# EAGLE board Helloworldbrd2 (EAGLE 7.5.0)
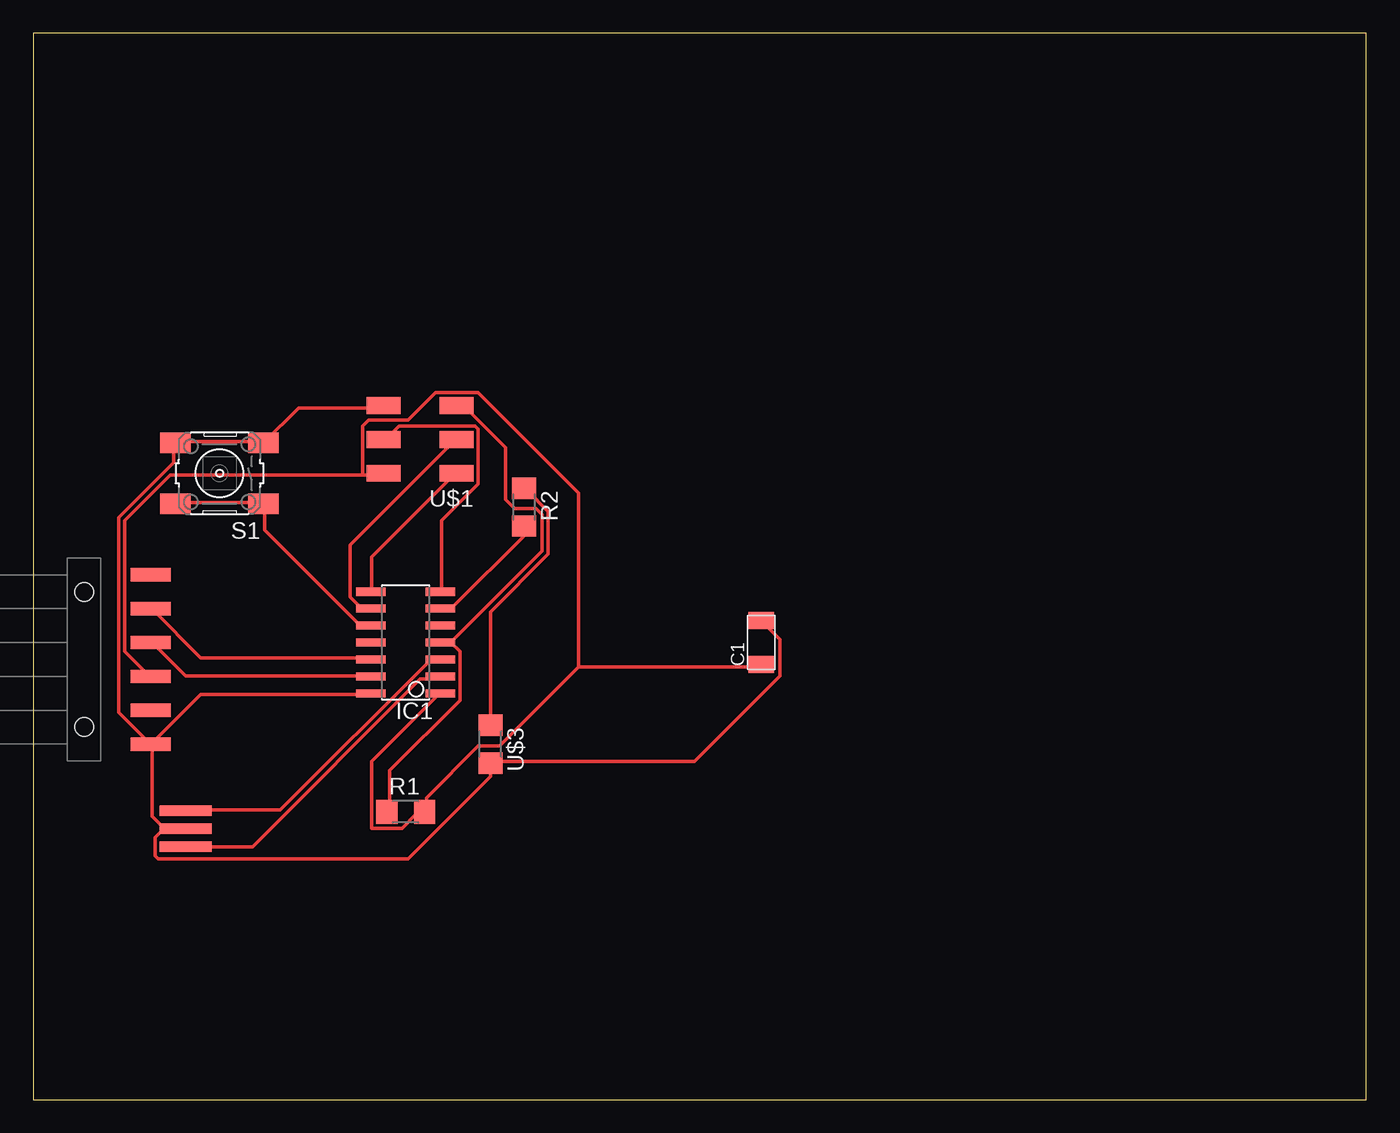
[diagram p0: board, top side]

Size 100 x 80 mm. Coordinates in mm from the lower left corner, seen from the top.
Outline: 0,0 100,0 100,80 0,80 0,0
Copper layers (1*16): Top 0.035mm / dielectric 1.5mm / Bottom 0.035mm
Design rules "default": minimum track width 10mil, minimum drill 24mil, track to track 8mil, track to pad 8mil, pad to pad 8mil, via to via 8mil, smd to smd 8mil, copper to edge 40mil, drill to drill 8mil, minimum pad ring 10mil, minimum via ring 8mil, stop-mask expansion 4mil, vias tented up to drill 0mil, thermal gap 10mil

## Footprints (pad centres in the part's own frame; a part is rotated, then mirrored left to right if it is on the bottom)
C1206FAB = smd 1.27 x 1.905: 1 -1.651,0; 2 1.651,0
SOIC14 = smd 0.61 x 2.21: 1 -3.81,-2.603; 2 -2.54,-2.603; 3 -1.27,-2.603; 4 0,-2.603; 5 1.27,-2.603; 6 2.54,-2.603; 7 3.81,-2.603; 8 3.81,2.603; 9 2.54,2.603; 10 1.27,2.603; 11 0,2.603; 12 -1.27,2.603; 13 -2.54,2.603; 14 -3.81,2.603
1X06-SMD = smd 1 x 3: 1 -6.35,5; 2 -3.81,5; 3 -1.27,5; 4 1.27,5; 5 3.81,5; 6 6.35,5 | hole 1.4: -5.08,0; 5.08,0
R1206 = smd 1.6 x 1.803: 1 -1.422,0; 2 1.422,0
6MM_SWITCH = smd 2.286 x 1.524: 1 -3.302,2.286; 2 3.302,2.286; 3 -3.302,-2.286; 4 3.302,-2.286
2X03SMD = smd 2.54 x 1.27: 1 -2.54,2.54; 2 2.92,2.54; 3 -2.54,0; 4 2.92,0; 5 -2.54,-2.54; 6 2.92,-2.54
EFOBM = smd 0.8 x 3.9: 1 -1.35,0; 2 0,0; 3 1.35,0
LED1206 = smd 1.6 x 1.803: 1 -1.422,0; 2 1.422,0

## Placement (x,y rotation side)
C1  1UF  [C1206FAB]  54.61,34.29 90 top
IC1  ATTINY44-SSU  [SOIC14]  27.94,34.29 90 top
JP1  [1X06-SMD]  3.81,33.02 270 top
R1  10k  [R1206]  27.94,21.59 0 top
R2  499  [R1206]  36.83,44.45 270 top
S1  [6MM_SWITCH]  13.97,46.99 180 top
U$1  AVRISPSMD  [2X03SMD]  29.21,49.53 180 top
U$2  RESONATOR  [EFOBM]  11.43,20.32 90 top
U$3  LED  [LED1206]  34.29,26.67 270 top

## Library data of the parts
C1 IC1 R1 R2 S1 U$1-U$3 = fab
JP1 = SparkFun

## Nets
BUTTON: IC1.10 S1.1 S1.2
CTS: JP1.5
GND: C1.2 IC1.14 JP1.6 S1.3 S1.4 U$1.6 U$2.2 U$3.2
LED: IC1.6 R2.2
MISO: IC1.8 U$1.1
MOSI: IC1.7 U$1.4
N$2: IC1.2 U$2.1
N$3: R2.1 U$3.1
N$4: IC1.3 U$2.3
RST: IC1.4 R1.1 U$1.5
RTS: JP1.1
RX: IC1.12 JP1.2
SCK: IC1.9 U$1.3
TX: IC1.13 JP1.3
VCC: C1.1 IC1.1 JP1.4 R1.2 U$1.2

## Tracks (layer width: path | path; a pad name or v marks a point on that pad's centre or on a via)
BUTTON
  Top 0.254: IC1.10 25.15,35.66 24.46,35.66 17.37,42.75 17.37,44.58 S1.1 17.14,44.81 10.74,44.81 S1.2
GND
  Top 0.254: C1.2 54.63,35.89 56.01,34.52 56.01,31.77 49.61,25.38 34.29,25.38 U$3.2 34.29,24.23 28.12,18.06 9.37,18.06 9.14,18.29 9.14,19.66 9.83,20.34 | U$1.6 26.29,51.89 19.89,51.89 S1.3 17.14,49.38 10.74,49.38 S1.4 10.52,49.15 10.52,47.78 6.4,43.66 6.4,29.03 8.69,26.75 JP1.6 | IC1.14 25.15,30.4 12.57,30.4 8.91,26.75 JP1.6 | 9.83,20.34 11.43,20.34 U$2.2 9.83,20.34 | 9.83,20.34 8.91,21.26 8.91,26.52 JP1.6
LED
  Top 0.254: R2.2 36.8,42.98 36.8,42.29 31.55,37.03 30.63,37.03 IC1.6
MISO
  Top 0.254: IC1.8 25.38,38.18 25.38,40.69 31.55,46.86 U$1.1
MOSI
  Top 0.254: IC1.7 30.63,38.18 30.63,43.43 33.38,46.18 33.38,50.29 33.15,50.52 27.43,50.52 26.52,49.61 U$1.4
N$2
  Top 0.254: IC1.2 30.4,31.55 29.03,31.55 16.46,18.97 U$2.1
N$3
  Top 0.254: U$3.1 34.29,36.58 38.63,40.92 38.63,44.12 37.03,45.72 R2.1
N$4
  Top 0.254: IC1.3 30.4,32.92 29.72,32.92 18.52,21.72 11.43,21.72 U$2.3
RST
  Top 0.254: 31.32,34.29 32,33.6 32,29.95 26.75,24.69 26.75,21.72 R1.1 | 31.32,34.29 IC1.4 30.63,34.29 | 31.32,34.29 38.18,41.15 38.18,43.89 37.72,44.35 36.12,44.35 35.43,45.03 35.43,48.92 32.46,51.89 31.77,51.89 U$1.5
RX
  Top 0.254: IC1.12 25.15,33.15 12.57,33.15 8.91,36.8 JP1.2
SCK
  Top 0.254: IC1.9 25.15,37.03 24.46,37.03 23.77,37.72 23.77,41.6 31.55,49.38 U$1.3
TX
  Top 0.254: IC1.13 25.15,31.77 11.43,31.77 8.91,34.29 JP1.3
VCC
  Top 0.254: 24.69,46.86 10.29,46.86 6.86,43.43 6.86,33.6 8.69,31.77 JP1.4 | 24.69,46.86 26.29,46.86 U$1.2 | IC1.1 30.4,30.4 25.38,25.38 25.38,20.34 27.66,20.34 28.8,21.49 29.26,21.49 R1.2 29.49,21.72 29.49,22.63 33.38,26.52 34.98,26.52 40.92,32.46 | 40.92,32.46 54.41,32.46 C1.1 | 24.69,46.86 24.69,50.52 25.15,50.98 28.12,50.98 30.18,53.03 33.38,53.03 40.92,45.49 40.92,32.46